# Altium PCB PCB_test_2026-06-06.pcbdoc
Units mm, origin at the board's own origin, x right, y up, seen from the top; angles counter-clockwise.
Board outline 102.65 x 77.65 mm, 2 copper layers (Top Layer, Bottom Layer); 1 components, 2 nets, 3 pads, 0 vias.
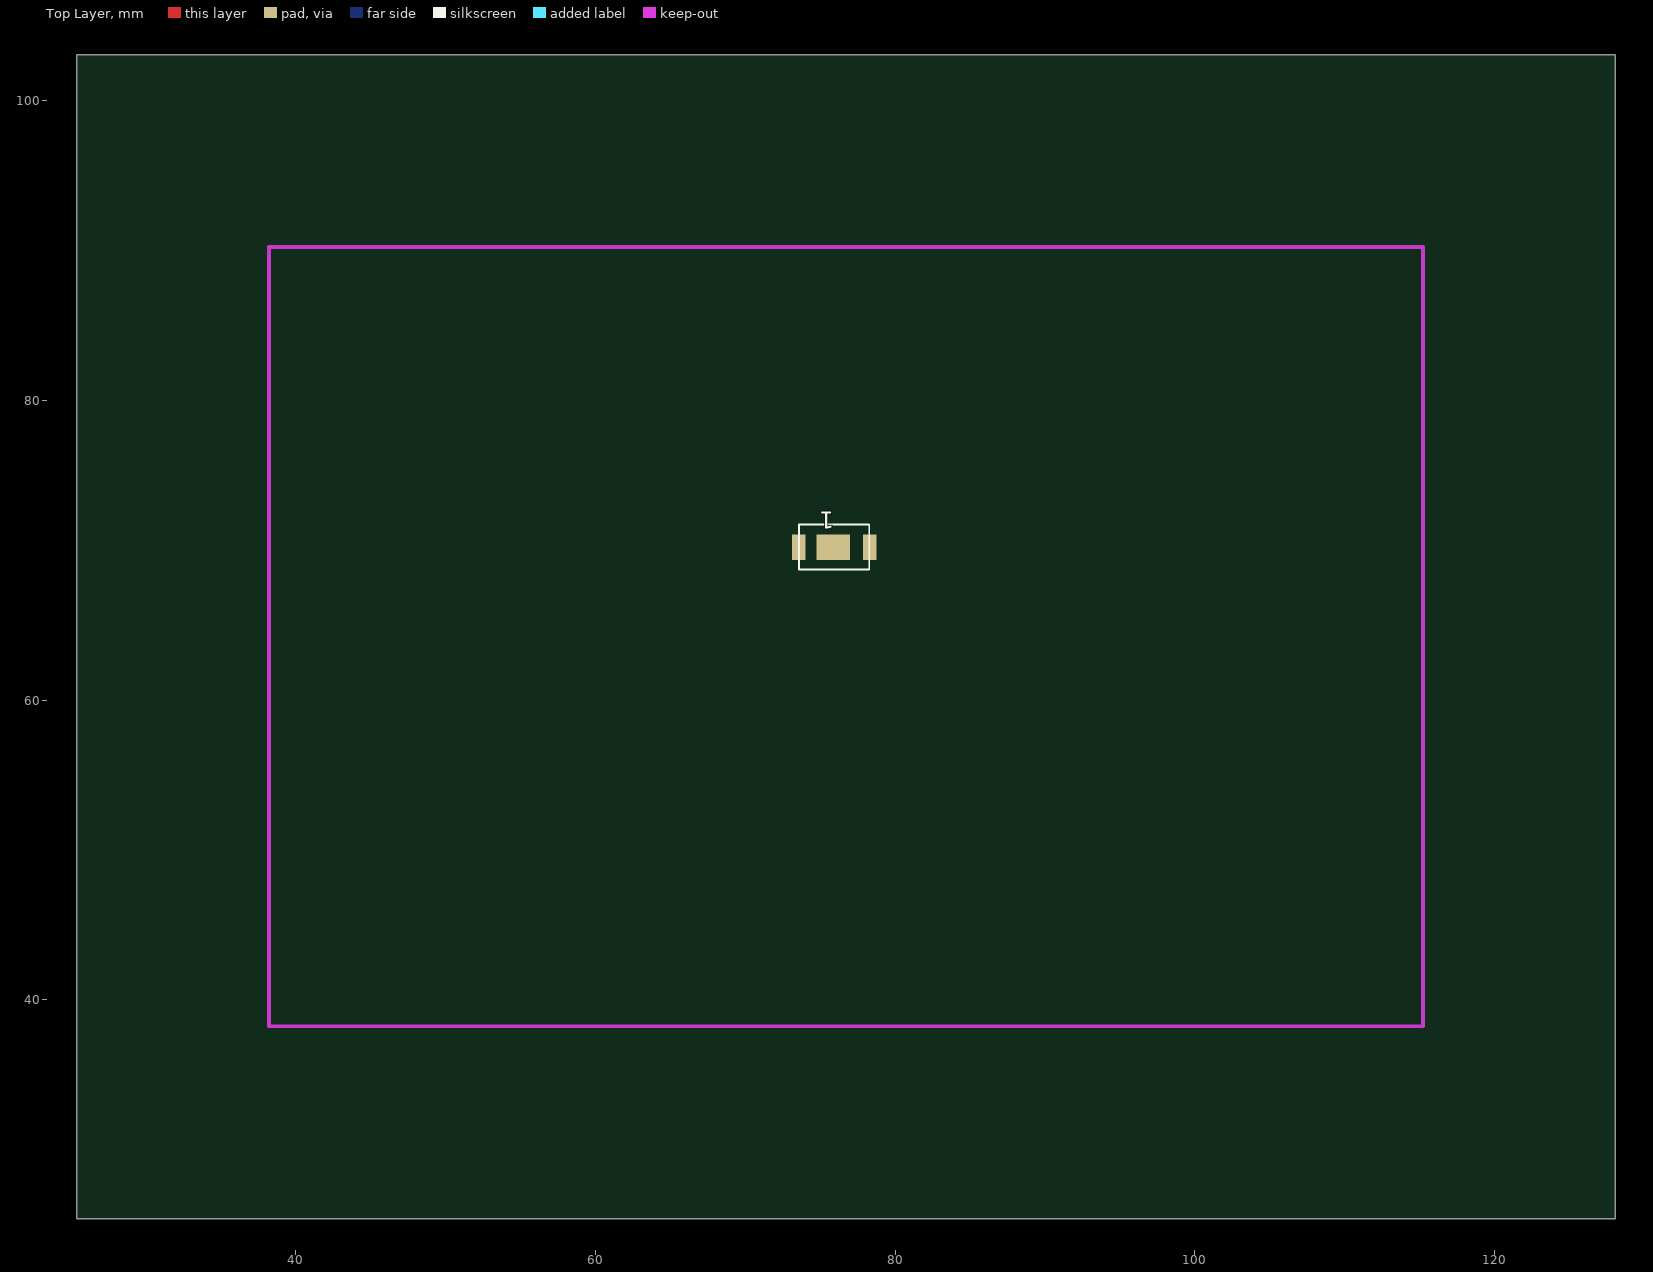
[diagram p0: Top Layer view]
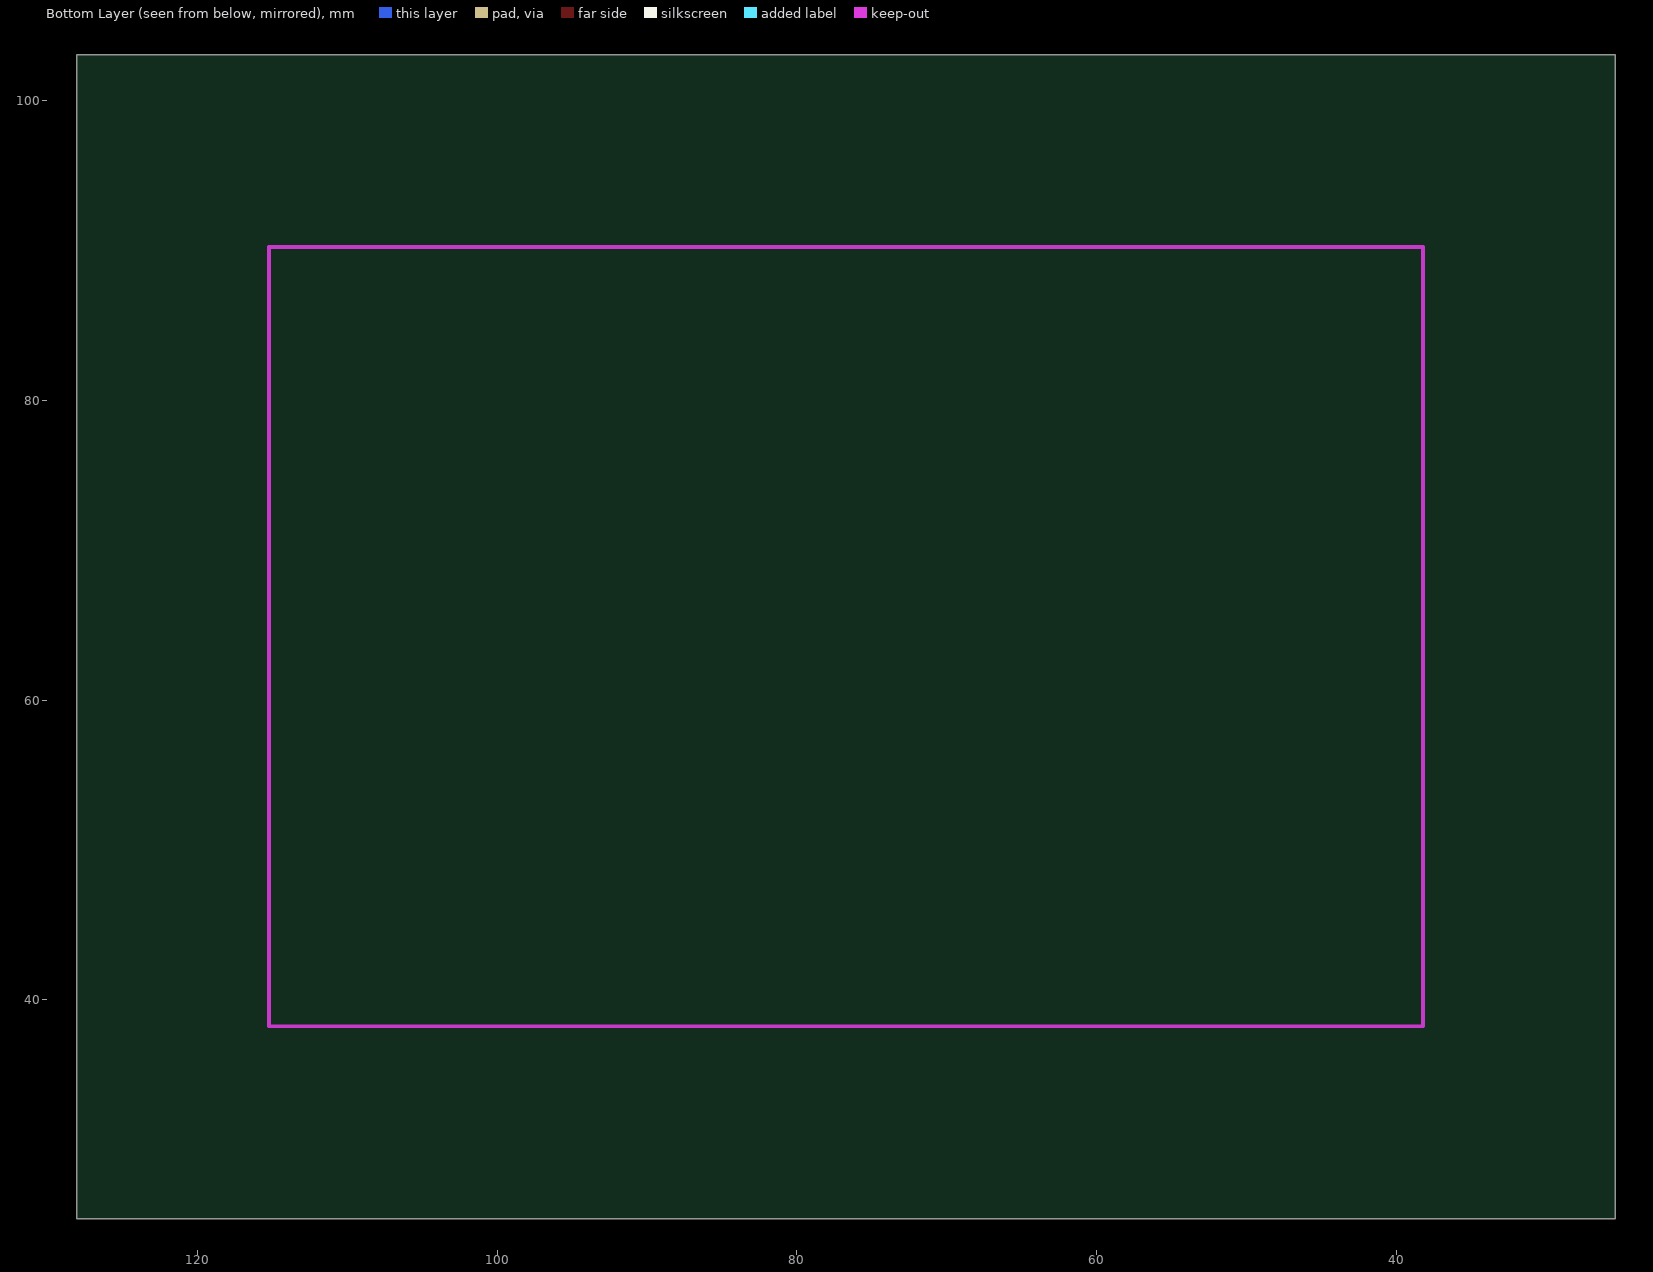
[diagram p1: Bottom Layer view, seen from below]

## Layer stack, top to bottom
Top Layer: signal copper (thickness not stored)
Dielectric: dielectric 0.32, FR-4, Dk 4.8
Bottom Layer: signal copper (thickness not stored)

## Board outline
128.054,25.4 25.4,25.4 25.4,103.054 128.054,103.054

## Components (designator, comment, footprint, x,y, rotation, side; value= is the part's Value field where it differs from the comment)
1 "5730-LED" 5730-LED 75.931,70.2 r0 top

## Footprints (in the part's own frame and the unit in brackets; to place one, negate y for a bottom-side part, rotate by r counter-clockwise, add the part's x,y. Pads: shape width x height; smd on the part's side, far side on the other; paste and mask are expansions set on the pad)
5730-LED [mm]
  rect 0.9x1.7 smd paste+0 mask+0.051: A(-2.35,0) C(2.38,0)
  rect 2.25x1.7 smd paste+0 mask+0.051: P$2(-0.055,0)
  silkscreen extent -2.35,-1.5 2.35,1.5

## Nets (pads, with @x,y where several pads share a name; then routed paths per layer and width w, separated by ;. In a path a pad name is that pad's centre, name@x,y a point inside that pad or via, vN(x,y) a via of type N, cw(c..) or ccw(c..) an arc to the next point about the centre after c; other vN are vias at no path point)
1_A: 1.A
1_C: 1.C
pads on no net: 1.P$2